# Altium PCB 海关全向控制器主控板电路V2.PcbDoc (part 3 of 3)
Units mil, origin at the board's own origin, x right, y up, seen from the top; angles counter-clockwise.
Board outline 7874.02 x 2362.2 mil, 2 copper layers (Top Layer, Bottom Layer), stack 42.17 mil thick; 192 components, 121 nets, 551 pads, 141 vias.
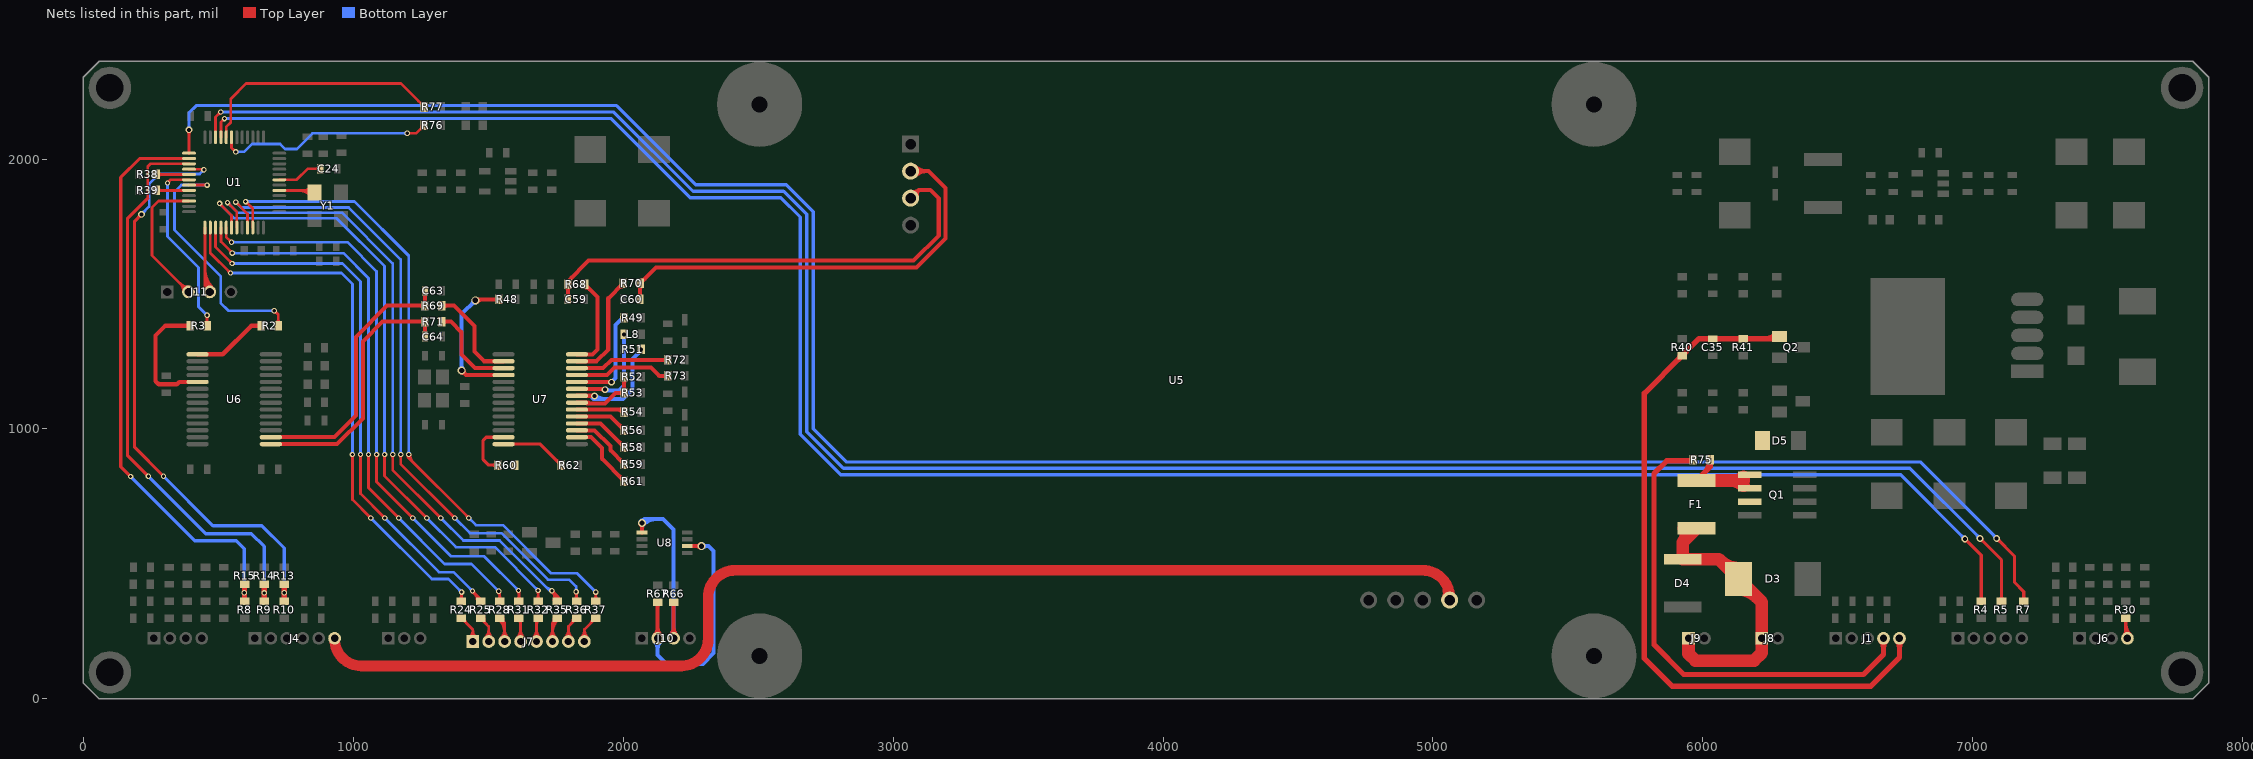
[diagram p3: the nets of this part, all layers, seen from the top]

## Via types
v1: diameter 20, hole 12, Top Layer to Bottom Layer, tented both sides, 71 vias
v2: diameter 25, hole 15, Top Layer to Bottom Layer, tented both sides, 34 vias
v3: diameter 50, hole 30, Top Layer to Bottom Layer, tented both sides, 18 vias
v4: diameter 30, hole 20, Top Layer to Bottom Layer, tented both sides, 10 vias
v5: diameter 70.87, hole 47.24, Top Layer to Bottom Layer, tented both sides, 5 vias
v6: diameter 60, hole 40, Top Layer to Bottom Layer, tented both sides, 3 vias

## Nets (pads, with @x,y where several pads share a name; then routed paths per layer and width w, separated by ;. In a path a pad name is that pad's centre, name@x,y a point inside that pad or via, vN(x,y) a via of type N, cw(c..) or ccw(c..) an arc to the next point about the centre after c; other vN are vias at no path point) (continued)
NetJ6_4: J6.4 R30.2 | length 200.1
  Top Layer w12: J6.4@7560.37,236.87 ccw(c7544.55,252.7) 7566.93,252.7 ; R30.2@7561.43,293.71 cw(c7548.15,280.43) 7566.93,280.43 cw(c7585.71,280.43) R30.2@7572.43,293.71 ; 7566.93,252.24 ccw(c7600.66,252.24) J6.4@7576.81,228.38 ; 7566.93,281.21 ccw(c7629.64,281.21) J6.4@7585.3,236.87 ; R30.2@7566.93,299.21 7566.93,230.31 J6.4@7572.83,224.41
NetJ7_1: J7.1 R24.1 | length 206.4
  Top Layer w10: R24.1@1400.57,299.21 1442.91,256.87 ; R24.1@1404.51,290.43 cw(c1404.51,278.74) R24.1@1412.78,287.01 ; R24.1@1413.29,299.21 ccw(c1443.99,299.21) 1422.28,277.5 ; J7.1@1429.89,225.91 ccw(c1399.6,256.87) 1442.91,256.87 ; J7.1@1442.91,212.6 1442.91,256.87 ; J7.1@1455.94,225.91 cw(c1486.23,256.87) 1442.91,256.87
NetJ7_2: J7.2 R25.1 | length 203.1
  Top Layer w10: R25.1@1471.73,299.21 1501.97,268.97 J7.2@1501.97,212.6 ; R25.1@1475.66,290.43 cw(c1475.66,278.74) R25.1@1483.93,287.01 ; R25.1@1484.44,299.21 ccw(c1515.14,299.21) 1493.43,277.5 ; J7.2@1488.8,225.77 ccw(c1457.01,257.56) 1501.97,257.56 ccw(c1546.93,257.56) J7.2@1515.14,225.77
NetJ7_3: J7.3 R28.1 | length 305.2
  Top Layer w10: R28.1@1540.61,293 cw(c1491.32,243.72) 1561.02,243.72 ; R28.1@1542.88,299.21 1561.02,281.07 ; R28.1@1547.68,300.08 cw(c1515.46,267.86) 1561.02,267.86 ; J7.3@1547.86,225.77 ccw(c1516.07,257.56) 1561.02,257.56 ccw(c1605.98,257.56) J7.3@1574.19,225.77 ; R28.1@1555.08,287.01 ccw(c1546.82,278.74) 1546.82,290.43 cw(c1546.76,276.17) 1561.02,276.17 ; R28.1@1555.5,297.9 ccw(c1574.9,294.95) 1561.02,281.07 ; J7.3@1561.02,212.6 1561.02,281.07
NetJ7_4: J7.4 R31.1 | length 193
  Top Layer w10: J7.4@1606.91,225.77 ccw(c1575.12,257.56) 1620.08,257.56 ccw(c1665.04,257.56) J7.4@1633.25,225.77 ; R31.1@1611.76,293 cw(c1591.67,272.92) 1620.08,272.92 ; R31.1@1614.03,299.21 1620.08,293.16 J7.4@1620.08,212.6 ; 1620.08,283.12 cw(c1634.06,283.12) R31.1@1624.18,293
NetJ7_5: J7.5 R32.1 | length 193
  Top Layer w10: J7.5@1665.97,225.77 ccw(c1634.18,257.56) 1679.13,257.56 ccw(c1724.09,257.56) J7.5@1692.3,225.77 ; R32.1@1675.04,293 cw(c1665.15,283.11) 1679.13,283.11 ; J7.5@1679.13,212.6 1679.13,293.16 R32.1@1685.18,299.21 ; 1679.13,272.92 cw(c1707.54,272.92) R32.1@1687.45,293
NetJ7_6: J7.6 R35.1 | length 305.2
  Top Layer w10: J7.6@1725.02,225.77 ccw(c1693.23,257.56) 1738.19,257.56 ccw(c1783.15,257.56) J7.6@1751.36,225.77 ; J7.6@1738.19,212.6 1738.19,281.07 ; 1738.19,243.72 cw(c1807.89,243.72) R35.1@1758.6,293 ; 1738.19,267.86 cw(c1783.75,267.86) R35.1@1751.53,300.08 ; 1738.19,276.17 cw(c1752.45,276.17) 1752.42,290.43 ccw(c1752.4,278.74) R35.1@1744.13,287.01 ; R35.1@1743.72,297.89 cw(c1724.31,294.95) 1738.19,281.07 ; R35.1@1756.33,299.21 1738.19,281.07
NetJ7_7: J7.7 R36.1 | length 203.1
  Top Layer w10: J7.7@1784.08,225.77 ccw(c1752.29,257.56) 1797.24,257.56 ccw(c1842.2,257.56) J7.7@1810.41,225.77 ; J7.7@1797.24,212.6 1797.24,268.97 R36.1@1827.49,299.21 ; 1805.78,277.5 ccw(c1784.07,299.21) R36.1@1814.77,299.21 ; R36.1@1815.28,287.01 cw(c1823.55,278.74) R36.1@1823.55,290.43
NetJ7_8: J7.8 R37.1 | length 206.4
  Top Layer w10: J7.8@1843.28,225.91 ccw(c1812.98,256.87) 1856.3,256.87 ; J7.8@1856.3,212.6 1856.3,256.87 ; J7.8@1869.32,225.91 cw(c1899.62,256.87) 1856.3,256.87 ; 1876.93,277.5 ccw(c1855.22,299.21) R37.1@1885.92,299.21 ; R37.1@1886.43,287.01 cw(c1894.7,278.74) R37.1@1894.7,290.43 ; R37.1@1898.64,299.21 1856.3,256.87
NetL8_1: L8.1 U7.23 | length 412.6
  Top Layer w15: U7.23@1828.74,1148.62 1930.12,1148.62 v2(1933.07,1145.67) ; 1913.87,1148.62 cw(c1913.87,1126.47) v2@1929.54,1142.13
  Bottom Layer w15: v2(1933.07,1145.67) 1937.01,1141.73 1984.25,1141.73 2003.94,1161.42 v2(2003.94,1350.39) ; v2@1936.61,1149.2 ccw(c1954.65,1167.25) 1954.65,1141.73
NetR2_2: R2.2 U6.1 | length 301.8
  Top Layer w16: U6.1@423.23,1276.57 516.73,1276.57 622.05,1381.89 R2.2@659.45,1381.89 ; R2.2@655.36,1377.8 ccw(c645.5,1367.94) 645.5,1381.89 ccw(c645.5,1395.84) R2.2@655.36,1385.98
NetR3_2: R3.2 U6.5 | length 497.9
  Top Layer w16: R3.2@391.58,1377.8 ccw(c381.72,1367.94) 381.72,1381.89 ccw(c381.72,1395.84) R3.2@391.58,1385.98 ; R3.2@395.67,1381.89 303.15,1381.89 267.72,1346.46 267.72,1177.17 279.53,1165.35 346.46,1165.35 355.32,1174.21 U6.5@423.23,1174.21
NetR48_1: R48.1 U7.4 | length 665.6
  Top Layer w15: v4@1401.57,1209.04 cw(c1401.57,1190.93) 1414.38,1203.73 cw(c1427.18,1216.54) v4@1409.07,1216.54 ; v4(1401.57,1216.54) 1418.31,1199.8 U7.4@1557.09,1199.8 ; v4(1452.76,1476.38) 1456.69,1480.32 R48.1@1539.37,1480.32 ; v4@1458.06,1471.07 cw(c1480.37,1448.77) 1480.37,1480.32 ; R48.1@1534.93,1475.87 ccw(c1524.21,1465.16) 1524.21,1480.32 ccw(c1524.21,1495.48) R48.1@1534.93,1484.76
  Bottom Layer w15: v4@1396.27,1221.84 ccw(c1383.47,1234.64) 1401.57,1234.64 ccw(c1419.68,1234.64) v4@1406.88,1221.84 ; v4(1401.57,1216.54) 1401.57,1425.2 v4(1452.76,1476.38) ; v4@1445.26,1476.38 cw(c1427.15,1476.38) 1439.95,1463.57 cw(c1452.76,1450.77) v4@1452.76,1468.88
NetR49_2: R49.2 U7.24 | length 398.6
  Top Layer w15: U7.24@1828.74,1174.21 1955.7,1174.21 v2(1956.69,1173.23) ; 1942.24,1174.21 cw(c1942.24,1158.77) v2@1953.15,1169.69
  Bottom Layer w15: v2(1956.69,1173.23) 1972.44,1188.98 1972.44,1385.83 v2(2000,1413.39)
NetR51_2: R51.2 U7.22 | length 468.3
  Top Layer w15: U7.22@1828.74,1123.03 1892.71,1123.03 v2(1893.7,1122.05) ; 1879.24,1123.03 cw(c1879.24,1107.59) v2@1890.16,1118.51
  Bottom Layer w15: v2@1886.63,1114.97 ccw(c1898.06,1126.41) 1898.06,1110.24 ; v2(1893.7,1122.05) 1905.51,1110.24 2000,1110.24 2035.43,1145.67 2035.43,1259.84 v2@2066.93,1291.34 ; v2@1897.23,1125.58 ccw(c1934.28,1162.62) 1934.28,1110.24 ; 2055.61,1280.02 ccw(c2040.35,1295.28) v2@2061.93,1295.28
  other v2: 2066.93,1295.28
NetR52_2: R52.2 R53.2 U7.21 | length 353.1
  Top Layer w15: U7.21@1828.74,1097.44 1871.06,1097.44 1874.02,1094.49 ; U7.21@1862.33,1097.09 cw(c1866.13,1086.6) 1874.02,1094.49 ; R53.2@1999.5,1129.42 ccw(c1988.78,1118.7) 1988.78,1133.86 ccw(c1988.78,1149.02) R53.2@1999.5,1138.3 ; R53.2@1999.5,1142.24 ccw(c1988.78,1152.96) 2003.94,1152.96 ccw(c2019.1,1152.96) R53.2@2008.38,1142.24 ; R52.2@1999.5,1184.54 cw(c1988.78,1173.82) 2003.94,1173.82 cw(c2019.1,1173.82) R52.2@2008.38,1184.54 ; R52.2@2003.94,1192.91 R53.2@2003.94,1133.86 1972.44,1133.86 1933.07,1094.49 1874.02,1094.49 ; U7.21@1862.47,1097.71 ccw(c1870.24,1105.47) 1870.24,1094.49 cw(c1870.24,1105.47) U7.21@1862.47,1097.71
NetR54_2: R54.2 U7.20 | length 204
  Top Layer w15: U7.20@1828.74,1071.85 1995.08,1071.85 R54.2@2003.94,1062.99 ; 1976.9,1071.85 cw(c1976.9,1039.89) R54.2@1999.5,1062.49
NetR56_2: R56.2 U7.19 | length 215.4
  Top Layer w15: U7.19@1828.74,1046.26 1953.74,1046.26 R56.2@2003.94,996.06 ; 1986.5,1013.5 ccw(c2003.94,1030.94) R56.2@2003.94,1006.28
NetR58_2: R58.2 U7.18 | length 230.9
  Top Layer w15: U7.18@1828.74,1020.67 1916.34,1020.67 R58.2@2003.94,933.07 ; 1986.5,950.51 ccw(c2003.94,967.95) R58.2@2003.94,943.29
NetR59_2: R59.2 U7.17 | length 255.6
  Top Layer w15: U7.17@1828.74,995.08 1894.68,995.08 1952.76,937.01 1952.76,921.26 R59.2@2003.94,870.08 ; 1986.5,887.52 ccw(c2003.94,904.96) R59.2@2003.94,880.3
NetR60_1: R60.1 U7.13 | length 243.7
  Top Layer w12: R60.1@1529.93,860.64 ccw(c1516.65,847.36) 1516.65,866.14 ccw(c1516.65,884.92) R60.1@1529.93,871.64 ; R60.1@1535.43,866.14 1501.97,866.14 1481.3,886.81 1481.3,957.68 1493.11,969.49 U7.13@1557.09,969.49
NetR61_2: R61.2 U7.16 | length 284.9
  Top Layer w15: U7.16@1828.74,969.49 1880.91,969.49 1921.26,929.13 1921.26,889.76 R61.2@2003.94,807.09 ; 1986.5,824.53 ccw(c2003.94,841.97) R61.2@2003.94,817.3
NetR62_1: R62.1 U7.14 | length 268
  Top Layer w12: U7.14@1557.09,943.9 1692.91,943.9 R62.1@1770.67,866.14 ; 1750.67,886.14 ccw(c1770.67,906.14) R62.1@1770.67,877.86
NetR68_2: R68.2 U7.28 | length 363.6
  Top Layer w15: U7.28@1828.74,1276.57 1886.81,1276.57 1905.51,1295.28 1905.51,1488.19 R68.2@1858.27,1535.43 ; R68.2@1858.27,1525.22 cw(c1858.27,1500.55) 1875.71,1517.99
NetR69_1: R69.1 U7.2 | length 390.7
  Top Layer w15: R69.1@1330.71,1456.69 1374.02,1456.69 1448.82,1381.89 1448.82,1287.4 1485.24,1250.98 U7.2@1557.09,1250.98 ; R69.1@1333.18,1452.25 cw(c1343.9,1441.53) 1343.9,1456.69 cw(c1343.9,1471.85) R69.1@1333.18,1461.13
NetR70_2: R70.2 U7.27 | length 420.8
  Top Layer w15: U7.27@1828.74,1250.98 1900.59,1250.98 1944.88,1295.28 1944.88,1484.25 R70.2@2000,1539.37 ; 1982.56,1521.93 cw(c2000,1504.49) R70.2@2000,1529.15
NetR71_1: R71.1 U7.3 | length 370
  Top Layer w15: R71.1@1330.71,1397.64 1362.2,1397.64 1401.57,1358.27 1401.57,1275.59 1451.77,1225.39 U7.3@1557.09,1225.39 ; R71.1@1333.18,1393.2 cw(c1343.9,1382.48) 1343.9,1397.64 cw(c1343.9,1412.8) R71.1@1333.18,1402.08
NetR72_2: R72.2 U7.26 | length 373.1
  Top Layer w15: U7.26@1828.74,1225.39 1926.18,1225.39 1956.69,1255.91 R72.2@2165.35,1255.91 ; R72.2@2160.91,1251.47 ccw(c2150.19,1240.75) 2150.19,1255.91 ccw(c2150.19,1271.07) R72.2@2160.91,1260.35
NetR73_2: R73.2 U7.25 | length 382.2
  Top Layer w15: U7.25@1828.74,1199.8 1939.96,1199.8 1967.19,1227.03 2103.68,1227.03 2133.86,1196.85 R73.2@2163.39,1196.85 ; R73.2@2160.91,1192.41 ccw(c2150.19,1181.69) 2150.19,1196.85 ccw(c2150.19,1212.01) R73.2@2160.91,1201.29
NRST: C24.1 U1.7 | length 194.5
  Top Layer w10: U1.7@726.38,1923.23 790.35,1923.23 831.69,1964.57 C24.1@877.95,1964.57 ; C24.1@873.14,1959.75 ccw(c861.51,1948.12) 861.51,1964.57 ccw(c861.51,1981.01) C24.1@873.14,1969.38
POWLEDB1: R25.2 U1.39 | length 2283.7
  Top Layer w10: U1.39@490.16,1746.06 490.16,1674.21 v1(551.18,1613.19) ; v1@546.18,1613.19 ccw(c534.11,1613.19) 542.65,1621.72 ccw(c551.18,1630.26) v1@551.18,1618.19 ; v1@1023.32,901.98 cw(c1014.78,893.44) 1026.86,893.44 cw(c1038.93,893.44) v1@1030.39,901.98 ; v1(1026.86,905.51) 1026.86,760.26 v1(1116.84,670.28) ; v1@1111.84,670.28 ccw(c1099.77,670.28) 1108.31,678.81 ccw(c1116.84,687.35) v1@1116.84,675.28 ; v1@1119.94,673.37 v1@1120.08,673.23 ; v1@1440.64,394.78 cw(c1436.63,379.84) 1450.02,387.57 ; v1@1441.93,394.61 cw(c1441.93,382.54) 1450.46,391.07 cw(c1459,399.61) v1@1446.93,399.61 ; v1(1441.93,399.61) 1471.73,369.81 R25.2@1471.73,362.2 ; v1@1444.64,396.89 cw(c1409.95,362.2) R25.2@1459.01,362.2 ; 1461.71,379.82 cw(c1444.09,362.2) R25.2@1469.01,362.2
  Bottom Layer w10: v1(551.18,1613.19) 959.65,1613.19 1026.86,1545.98 v1(1026.86,905.51) ; v1@554.72,1609.65 cw(c563.25,1601.12) 563.25,1613.19 cw(c563.25,1625.26) v1@554.72,1616.72 ; v1@1023.32,909.05 ccw(c1014.78,917.58) 1026.86,917.58 ccw(c1038.93,917.58) v1@1030.39,909.05 ; v1@1116.84,665.28 cw(c1116.84,653.2) 1125.38,661.74 cw(c1133.92,670.28) v1@1121.84,670.28 ; v1(1116.84,670.28) 1317.77,469.35 1372.19,469.35 v1(1441.93,399.61) ; v1@1436.93,399.61 ccw(c1424.86,399.61) 1433.39,408.14 ccw(c1441.93,416.68) v1@1441.93,404.61
POWLEDB2: R31.2 U1.41 | length 2334.3
  Top Layer w10: U1.41@529.53,1746.06 529.53,1711.61 v1(549.21,1691.93) ; v1@544.21,1691.93 ccw(c532.14,1691.93) 540.68,1700.46 ccw(c549.21,1709) v1@549.21,1696.93 ; v1@1082.94,901.98 cw(c1074.4,893.44) 1086.47,893.44 cw(c1098.54,893.44) v1@1090.01,901.98 ; v1(1086.47,905.51) 1086.47,804.41 v1(1220.61,670.28) ; v1@1215.61,670.28 ccw(c1203.54,670.28) 1212.08,678.81 ccw(c1220.61,687.35) v1@1220.61,675.28 ; R31.2@1607.82,368.41 ccw(c1592.83,383.4) 1614.03,383.4 ccw(c1635.23,383.4) R31.2@1620.24,368.41 ; v1@1608.67,398.04 cw(c1595.73,385.1) 1614.03,385.1 ; R31.2@1614.03,362.2 v1@1614.03,399.75
  Bottom Layer w10: v1(549.21,1691.93) 978.35,1691.93 1086.47,1583.8 v1(1086.47,905.51) ; v1@552.75,1688.39 cw(c561.28,1679.86) 561.28,1691.93 cw(c561.28,1704) v1@552.75,1695.46 ; v1@1082.94,909.05 ccw(c1074.4,917.58) 1086.47,917.58 ccw(c1098.54,917.58) v1@1090.01,909.05 ; v1@1220.61,665.28 cw(c1220.61,653.2) 1229.15,661.74 cw(c1237.68,670.28) v1@1225.61,670.28 ; v1(1220.61,670.28) 1362.34,528.54 1485.24,528.54 v1(1612.2,401.57) ; v1@1607.2,401.57 ccw(c1595.13,401.57) 1603.67,410.11 ccw(c1612.2,418.65) v1@1612.2,406.57
POWLEDB3: R35.2 U1.43 | length 2690.6
  Top Layer w10: v1@534.45,1833.58 cw(c534.45,1821.51) 542.98,1830.05 cw(c551.52,1838.58) v1@539.45,1838.58 ; v1(534.45,1838.58) 568.9,1804.13 U1.43@568.9,1746.06 ; v1@1142.56,901.98 cw(c1134.02,893.44) 1146.09,893.44 cw(c1158.16,893.44) v1@1149.63,901.98 ; v1(1146.09,905.51) 1146.09,848.57 v1(1324.38,670.28) ; v1@1319.38,670.28 ccw(c1307.31,670.28) 1315.85,678.81 ccw(c1324.38,687.35) v1@1324.38,675.28 ; v1@1734.93,395.76 cw(c1731.8,384.1) 1742.26,390.14 cw(c1752.71,396.17) v1@1741.05,399.3 ; v1@1736.22,395.59 cw(c1736.22,383.52) 1744.76,392.06 cw(c1753.29,400.59) v1@1741.22,400.59 ; R35.2@1744.14,365.18 ccw(c1712.28,376.65) v1(1736.22,400.59) 1756.33,380.48 ; 1747.36,389.45 cw(c1728.66,370.75) R35.2@1753.55,361.79 ; R35.2@1750.85,369.06 ccw(c1741.71,380.48) 1756.33,380.48 ; R35.2@1756.33,362.2 1756.33,380.48 ; 1758.51,378.31 cw(c1745.05,364.85) R35.2@1762.95,358.4 ; R35.2@1761.82,369.06 cw(c1770.96,380.48) 1756.33,380.48
  Bottom Layer w10: v1@534.45,1833.58 cw(c534.45,1821.51) 542.98,1830.05 cw(c551.52,1838.58) v1@539.45,1838.58 ; v1(534.45,1838.58) 571.85,1801.18 957.68,1801.18 1146.09,1612.77 v1(1146.09,905.51) ; v1@1142.56,909.05 ccw(c1134.02,917.58) 1146.09,917.58 ccw(c1158.16,917.58) v1@1149.63,909.05 ; v1@1324.38,665.28 cw(c1324.38,653.2) 1332.92,661.74 cw(c1341.45,670.28) v1@1329.38,670.28 ; v1(1324.38,670.28) 1408.04,586.61 1542.32,586.61 1728.35,400.59 v1(1736.22,400.59) ; 1714.24,414.69 ccw(c1736.22,436.67) v1@1736.22,405.59
POWLEDB4: R37.2 U1.46 | length 2709.7
  Top Layer w10: v1@601.38,1837.52 cw(c601.38,1825.45) 609.91,1833.98 cw(c618.45,1842.52) v1@606.38,1842.52 ; v1(601.38,1842.52) 627.95,1815.95 U1.46@627.95,1746.06 ; v1@1200.71,905.51 ccw(c1219.53,905.51) 1206.22,892.2 ; v1@1202.17,901.98 cw(c1193.64,893.44) 1205.71,893.44 cw(c1217.78,893.44) v1@1209.24,901.98 ; v1(1205.71,905.51) 1205.71,892.72 v1(1428.15,670.28) ; v1@1210.71,905.51 ccw(c1253.67,905.51) 1223.29,875.13 ; v1@1423.15,670.28 ccw(c1411.08,670.28) 1419.61,678.81 ccw(c1428.15,687.35) v1@1428.15,675.28 ; R37.2@1892.43,368.41 ccw(c1877.44,383.4) 1898.64,383.4 ccw(c1919.83,383.4) R37.2@1904.85,368.41 ; v1@1895.09,392.13 cw(c1886.51,383.56) 1898.64,383.56 ; R37.2@1898.64,362.2 v1(1898.62,395.67) ; 1898.64,383.64 cw(c1910.66,383.64) v1@1902.16,392.13
  Bottom Layer w10: v1(601.38,1842.52) 1004.92,1842.52 1205.71,1641.73 v1(1205.71,905.51) ; v1@604.91,1838.98 cw(c613.45,1830.45) 613.45,1842.52 cw(c613.45,1854.59) v1@604.91,1846.06 ; v1@1202.17,909.05 ccw(c1193.64,917.58) 1205.71,917.58 ccw(c1217.78,917.58) v1@1209.24,909.05 ; v1@1428.15,665.28 cw(c1428.15,653.2) 1436.68,661.74 cw(c1445.22,670.28) v1@1433.15,670.28 ; v1(1428.15,670.28) 1454.72,643.7 1554.13,643.7 1732.28,465.55 1828.74,465.55 v1(1898.62,395.67) ; v1@1893.62,395.67 ccw(c1881.55,395.67) 1890.09,404.2 ccw(c1898.62,412.74) v1@1898.62,400.67
POWLEDR1: R24.2 U1.38 | length 2226.4
  Top Layer w10: U1.38@470.47,1746.06 470.47,1652.56 v1(545.28,1577.76) ; v1@540.28,1577.76 ccw(c528.2,1577.76) 536.74,1586.29 ccw(c545.28,1594.83) v1@545.28,1582.76 ; v1@993.51,901.98 cw(c984.98,893.44) 997.05,893.44 cw(c1009.12,893.44) v1@1000.58,901.98 ; v1(997.05,905.51) 997.05,738.19 v1(1064.96,670.28) ; v1@1059.96,670.28 ccw(c1047.89,670.28) 1056.43,678.81 ccw(c1064.96,687.35) v1@1064.96,675.28 ; R24.2@1394.37,368.41 ccw(c1379.38,383.4) 1400.57,383.4 ccw(c1421.77,383.4) R24.2@1406.78,368.41 ; v1@1399.61,396.65 1400.57,395.69 R24.2@1400.57,362.2 ; 1400.57,381.18 cw(c1416.06,381.18) v1@1405.11,392.13
  Bottom Layer w10: v1(545.28,1577.76) 956.69,1577.76 997.05,1537.4 v1(997.05,905.51) ; v1@548.81,1574.22 cw(c557.35,1565.68) 557.35,1577.76 cw(c557.35,1589.83) v1@548.81,1581.29 ; v1@993.51,909.05 ccw(c984.98,917.58) 997.05,917.58 ccw(c1009.12,917.58) v1@1000.58,909.05 ; v1@1064.96,665.28 cw(c1064.96,653.2) 1073.5,661.74 cw(c1082.03,670.28) v1@1069.96,670.28 ; v1(1064.96,670.28) 1291.34,443.9 1353.35,443.9 v1(1401.57,395.67) ; v1@1396.57,395.67 ccw(c1384.5,395.67) 1393.04,404.2 ccw(c1401.57,412.74) v1@1401.57,400.67
POWLEDR2: R28.2 U1.40 | length 2290.7
  Top Layer w10: U1.40@509.84,1746.06 509.84,1693.9 v1(552.17,1651.57) ; v1@547.17,1651.57 ccw(c535.09,1651.57) 543.63,1660.11 ccw(c552.17,1668.65) v1@552.17,1656.57 ; v1@1053.13,901.98 cw(c1044.59,893.44) 1056.66,893.44 cw(c1068.74,893.44) v1@1060.2,901.98 ; v1(1056.66,905.51) 1056.66,782.34 v1(1168.73,670.28) ; v1@1163.73,670.28 ccw(c1151.66,670.28) 1160.19,678.81 ccw(c1168.73,687.35) v1@1168.73,675.28 ; v1@1535.83,395.09 cw(c1518.83,378.08) 1542.88,378.08 ; R28.2@1536.67,368.41 ccw(c1521.68,383.4) 1542.88,383.4 ccw(c1564.07,383.4) R28.2@1549.09,368.41 ; R28.2@1542.88,362.2 v1@1542.88,395.11
  Bottom Layer w10: v1(552.17,1651.57) 963.58,1651.57 1056.66,1558.49 v1(1056.66,905.51) ; v1@555.7,1648.04 cw(c564.24,1639.5) 564.24,1651.57 cw(c564.24,1663.65) v1@555.7,1655.11 ; v1@1053.13,909.05 ccw(c1044.59,917.58) 1056.66,917.58 ccw(c1068.74,917.58) v1@1060.2,909.05 ; v1@1168.73,665.28 cw(c1168.73,653.2) 1177.26,661.74 cw(c1185.8,670.28) v1@1173.73,670.28 ; v1(1168.73,670.28) 1339,500 1437.99,500 v1(1539.37,398.62) ; v1@1534.37,398.62 ccw(c1522.3,398.62) 1530.83,407.16 ccw(c1539.37,415.69) v1@1539.37,403.62
POWLEDR3: R32.2 U1.42 | length 2561.4
  Top Layer w10: v1@504.92,1830.63 cw(c504.92,1818.56) 513.46,1827.09 cw(c521.99,1835.63) v1@509.92,1835.63 ; v1(504.92,1835.63) 549.21,1791.34 U1.42@549.21,1746.06 ; v1@1112.75,901.98 cw(c1104.21,893.44) 1116.28,893.44 cw(c1128.35,893.44) v1@1119.82,901.98 ; v1(1116.28,905.51) 1116.28,826.49 v1(1272.5,670.28) ; v1@1267.5,670.28 ccw(c1255.43,670.28) 1263.96,678.81 ccw(c1272.5,687.35) v1@1272.5,675.28 ; R32.2@1678.97,368.41 ccw(c1664.33,383.06) 1685.04,383.06 ; v1@1681.5,398.04 cw(c1672.97,389.5) 1685.04,389.5 cw(c1697.11,389.5) v1@1688.57,398.04 ; 1685.04,383.74 ccw(c1706.72,383.74) R32.2@1691.39,368.41 ; v1(1685.04,401.57) 1685.04,362.35 R32.2@1685.18,362.2
  Bottom Layer w10: v1@504.92,1830.63 cw(c504.92,1818.56) 513.46,1827.09 cw(c521.99,1835.63) v1@509.92,1835.63 ; v1(504.92,1835.63) 560.04,1780.51 938.98,1780.51 1116.28,1603.21 v1(1116.28,905.51) ; v1@1112.75,909.05 ccw(c1104.21,917.58) 1116.28,917.58 ccw(c1128.35,917.58) v1@1119.82,909.05 ; v1@1272.5,665.28 cw(c1272.5,653.2) 1281.03,661.74 cw(c1289.57,670.28) v1@1277.5,670.28 ; v1(1272.5,670.28) 1380.76,562.01 1524.61,562.01 v1(1685.04,401.57) ; v1@1680.04,401.57 ccw(c1667.97,401.57) 1676.5,410.11 ccw(c1685.04,418.65) v1@1685.04,406.57
POWLEDR4: R36.2 U1.45 | length 2662.6
  Top Layer w10: v1@564.96,1835.55 cw(c564.96,1823.48) 573.5,1832.02 cw(c582.03,1840.55) v1@569.96,1840.55 ; v1(564.96,1840.55) 608.27,1797.24 U1.45@608.27,1746.06 ; v1@1172.36,901.98 cw(c1163.83,893.44) 1175.9,893.44 cw(c1187.97,893.44) v1@1179.43,901.98 ; v1(1175.9,905.51) 1175.9,870.64 v1(1376.26,670.28) ; v1@1371.26,670.28 ccw(c1359.19,670.28) 1367.73,678.81 ccw(c1376.26,687.35) v1@1376.26,675.28 ; R36.2@1821.28,368.41 ccw(c1810.39,379.3) 1825.79,379.3 ; v1@1822.25,393.12 cw(c1813.72,384.58) 1825.79,384.58 cw(c1837.86,384.58) v1@1829.32,393.12 ; v1@1825.79,387.5 ccw(c1852.78,387.5) R36.2@1833.69,368.41 ; v1(1825.79,396.65) 1825.79,363.9 R36.2@1827.49,362.2 ; 1828.1,378.86 cw(c1847.58,384.07) v1@1830.12,394.15
  Bottom Layer w10: v1@564.96,1835.55 cw(c564.96,1823.48) 573.5,1832.02 cw(c582.03,1840.55) v1@569.96,1840.55 ; v1(564.96,1840.55) 584.65,1820.87 983.27,1820.87 1175.9,1628.23 v1(1175.9,905.51) ; v1@1172.36,909.05 ccw(c1163.83,917.58) 1175.9,917.58 ccw(c1187.97,917.58) v1@1179.43,909.05 ; v1@1376.26,665.28 cw(c1376.26,653.2) 1384.8,661.74 cw(c1393.34,670.28) v1@1381.26,670.28 ; v1(1376.26,670.28) 1432.37,614.17 1549.21,614.17 1721.46,441.93 1800.2,441.93 1825.79,416.34 v1(1825.79,396.65) ; v1@1822.25,400.19 ccw(c1813.72,408.72) 1825.79,408.72 ccw(c1837.86,408.72) v1@1829.32,400.19
POWSW+: J1.4 R75.1 | length 1836.8
  Top Layer w20: R75.1@5964.57,881.89 5866.14,881.89 5818.9,834.65 5818.9,200.79 5929.13,90.55 6594.49,90.55 6669.29,165.35 J1.4@6669.29,224.41 ; J1.4@6659.66,214.78 cw(c6636.41,191.52) 6669.29,191.52 cw(c6702.18,191.52) J1.4@6678.92,214.78
POWSW-: C35.2 J1.5 Q2.1 R40.2 R41.1 | length 2792.1
  Top Layer w20: R40.2@5910.06,1258.48 ccw(c5896.88,1271.65) R40.2@5915.51,1271.65 ; R40.2@5930.94,1271.65 cw(c5949.57,1271.65) R40.2@5936.4,1284.83 ; 6233.2,1334.65 ccw(c6233.2,1384.91) Q2.1@6268.74,1349.37 ; Q2.1@6283.46,1342.52 6275.59,1334.65 R41.1@6149.61,1334.65 C35.2@6036.42,1334.65 5986.22,1334.65 R40.2@5923.23,1271.65 5783.46,1131.89 5783.46,149.61 5885.83,47.24 6622.05,47.24 6728.35,153.54 J1.5@6728.35,224.41 ; J1.5@6718.71,214.78 cw(c6695.46,191.52) 6728.35,191.52 cw(c6761.23,191.52) J1.5@6737.98,214.78
SETDIG: R7.2 U1.25 | length 8396.3
  Top Layer w12: v2@387.14,2103.67 cw(c376.04,2092.58) 391.73,2092.58 cw(c407.42,2092.58) v2@396.33,2103.67 ; U1.25@391.73,2021.65 v2@391.73,2109.25 ; v2@7088.58,587.99 cw(c7088.58,572.3) 7099.68,583.39 cw(c7110.78,594.49) v2@7095.08,594.49 ; v2(7088.58,594.49) 7154.53,528.54 7154.53,432.09 7188.98,397.64 R7.2@7188.98,362.2 ; R7.2@7183.48,367.71 ccw(c7170.2,380.99) 7188.98,380.99 ccw(c7207.76,380.99) R7.2@7194.48,367.71
  Bottom Layer w12: v2@387.14,2112.86 ccw(c376.04,2123.96) 391.73,2123.96 ccw(c407.42,2123.96) v2@396.33,2112.86 ; v2(391.73,2108.27) 391.73,2171.26 418.46,2197.98 1975.69,2197.98 2268.77,1904.91 2604.43,1904.91 2704.12,1805.22 2704.12,1000.1 2826.11,878.1 6804.97,878.1 v2(7088.58,594.49) ; v2@7082.08,594.49 ccw(c7066.39,594.49) 7077.49,605.58 ccw(c7088.58,616.68) v2@7088.58,600.99
SLAVE1_N: C60.1 R70.1 U5.2 | length 1735.1
  Top Layer w15: R70.1@2058.55,1530.99 cw(c2047.83,1520.27) 2062.99,1520.27 cw(c2078.15,1520.27) R70.1@2067.43,1530.99 ; C60.1@2062.99,1480.31 R70.1@2062.99,1539.37 2122.05,1598.43 3086.54,1598.43 3186.97,1698.86 3194.29,1706.18 3194.29,1892.25 3131.42,1955.12 U5.2@3064.96,1955.12 ; R70.1@2062.99,1549.59 ccw(c2062.99,1574.25) 2080.43,1556.81 ; U5.2@3081.93,1938.15 cw(c3122.89,1897.19) 3122.89,1955.12 cw(c3122.89,2013.05) U5.2@3081.93,1972.09
SLAVE1_P: C59.1 R68.1 U5.3 | length 1884.7
  Top Layer w15: R68.1@1790.84,1527.06 cw(c1780.12,1516.34) 1795.28,1516.34 cw(c1810.44,1516.34) R68.1@1799.72,1527.06 ; C59.1@1795.28,1480.32 R68.1@1795.28,1535.43 1795.28,1547.24 1871.46,1623.43 3076.18,1623.43 3169.29,1716.54 3169.29,1854.33 3137.8,1885.83 3095.67,1885.83 ; R68.1@1801.56,1539.37 cw(c1835.72,1539.37) 1811.56,1563.53 ; U5.3@3064.96,1855.12 3095.67,1885.83 ; U5.3@3070.3,1878.51 ccw(c3076.37,1905.13) 3095.67,1885.83 ; U5.3@3088.36,1860.45 cw(c3114.97,1866.52) 3095.67,1885.83
SLAVE2_N: C63.1 R69.2 U6.16 | length 1047.5
  Top Layer w15: U6.16@694.88,969.49 930.12,969.49 1010.43,1049.8 1010.43,1341.14 1125.98,1456.69 R69.2@1265.75,1456.69 C63.1@1265.75,1511.81 ; R69.2@1261.31,1452.25 ccw(c1250.59,1441.53) 1250.59,1456.69 ccw(c1250.59,1471.85) R69.2@1261.31,1461.13 ; R69.2@1261.31,1465.07 ccw(c1250.59,1475.79) 1265.75,1475.79 ccw(c1280.91,1475.79) R69.2@1270.19,1465.07 ; R69.2@1266.73,1455.71 R69.2@1267.72,1456.69
SLAVE2_P: C64.1 R71.2 U6.15 | length 1029.5
  Top Layer w15: U6.15@694.88,943.9 929.53,943.9 930.12,944.49 940.47,944.49 1035.43,1039.45 1035.43,1323.82 1109.25,1397.64 R71.2@1265.75,1397.64 C64.1@1265.75,1342.52 ; R71.2@1261.31,1389.26 cw(c1250.59,1378.54) 1265.75,1378.54 cw(c1280.91,1378.54) R71.2@1270.19,1389.26 ; R71.2@1261.31,1393.2 ccw(c1250.59,1382.48) 1250.59,1397.64 ccw(c1250.59,1412.8) R71.2@1261.31,1402.08 ; R71.2@1266.73,1396.65 R71.2@1267.72,1397.64
SPAREIO1: R38.2 U1.29 | length 154.4
  Top Layer w10: R38.2@270.67,1942.91 U1.29@391.73,1942.91 ; R38.2@276.88,1936.71 cw(c291.87,1921.72) 291.87,1942.91 cw(c291.86,1964.11) R38.2@276.88,1949.12
SPAREIO2: R39.2 U1.32 | length 154.4
  Top Layer w10: R39.2@270.67,1883.86 U1.32@391.73,1883.86 ; R39.2@276.88,1877.65 cw(c291.87,1862.66) 291.87,1883.86 cw(c291.87,1905.05) R39.2@276.88,1890.07
SWCLK: J11.3 U1.37 | length 456.4
  Top Layer w10: 450.79,1547.32 ccw(c507.95,1547.32) J11.3@467.53,1506.9 ; 450.79,1571.46 ccw(c532.09,1571.46) J11.3@474.6,1513.97 ; 450.79,1595.6 ccw(c556.23,1595.6) J11.3@481.67,1521.04 ; U1.37@450.79,1746.06 450.79,1525.59 ; J11.3@452.1,1516.69 ccw(c445.45,1520.26) 450.79,1525.59 ; J11.3@459.69,1524.28 cw(c456.12,1530.92) 450.79,1525.59 ; J11.3@468.5,1507.87 450.79,1525.59
SWDIO: J11.2 U1.34 | length 586.1
  Top Layer w10: J11.2@371.14,1507.87 ccw(c326.18,1507.87) 357.97,1539.66 ccw(c389.76,1571.45) J11.2@389.76,1526.5 ; J11.2@389.76,1507.87 254.92,1642.72 254.92,1820.87 278.54,1844.49 U1.34@391.73,1844.49
TESTLED1: R76.1 U1.19 | length 923.9
  Top Layer w10: U1.19@549.21,2080.71 549.21,2041.34 v1@563.98,2026.57 ; 554.74,2035.81 ccw(c564.96,2046.02) v1@564.96,2031.57 ; 557.12,2033.43 cw(c550.27,2026.57) v1@559.96,2026.57 ; v1(1199.8,2095.47) 1233.27,2095.47 R76.1@1263.78,2125.98 ; v1@1203.34,2091.94 cw(c1211.87,2083.4) 1211.87,2095.47 cw(c1211.87,2107.54) v1@1203.34,2099.01 ; 1242.07,2104.28 cw(c1263.78,2082.57) R76.1@1263.78,2113.27 ; R76.1@1251.58,2113.78 ccw(c1243.31,2122.05) R76.1@1255,2122.05
  Bottom Layer w10: v1(564.96,2026.57) 595.47,2026.57 625,2056.1 729.33,2056.1 748.03,2037.4 791.34,2037.4 849.41,2095.47 v1@1198.82,2095.47 ; v1@568.5,2023.04 cw(c577.03,2014.5) 577.03,2026.57 cw(c577.03,2038.65) v1@568.5,2030.11 ; v1@1196.27,2091.94 ccw(c1187.73,2083.4) 1187.73,2095.47 ccw(c1187.73,2107.54) v1@1196.27,2099.01
TESTLED2: R77.1 U1.20 | length 959
  Top Layer w10: U1.20@529.53,2080.71 529.53,2119.09 546.26,2135.83 546.26,2222.44 603.35,2279.53 1177.17,2279.53 R77.1@1263.78,2192.91 ; 1242.07,2214.62 ccw(c1263.78,2236.33) R77.1@1263.78,2205.63 ; R77.1@1251.58,2205.12 cw(c1243.31,2196.85) R77.1@1255,2196.85
TTL_RX1: R2.1 U1.31 | length 1062.4
  Top Layer w10: U1.31@391.73,1903.54 v1(458.66,1903.54) ; v1@455.13,1900.01 ccw(c446.59,1891.47) 446.59,1903.54 ccw(c446.59,1915.61) v1@455.13,1907.08 ; v1@707.68,1432.99 cw(c707.68,1420.92) 716.21,1429.46 cw(c724.75,1437.99) v1@712.68,1437.99 ; v1(707.68,1437.99) 722.44,1423.23 R2.1@722.44,1381.89 ; R2.1@716.23,1392.03 ccw(c701.25,1407.02) 722.44,1407.02 ccw(c743.64,1407.02) R2.1@728.65,1392.03
  Bottom Layer w10: v1@455.13,1900.01 ccw(c446.59,1891.47) 446.59,1903.54 ccw(c446.59,1915.61) v1@455.13,1907.08 ; v1(458.66,1903.54) 363.19,1903.54 337.6,1877.95 337.6,1737.2 508.86,1565.94 508.86,1467.52 538.39,1437.99 v1(707.68,1437.99) ; v1@704.14,1434.46 ccw(c695.61,1425.92) 695.61,1437.99 ccw(c695.61,1450.06) v1@704.14,1441.53
TTL_RX3: R5.2 U1.22 | length 8116.1
  Top Layer w10: U1.22@490.16,2080.71 490.16,2155.51 v1(508.86,2174.21) ; v1@503.86,2174.21 cw(c491.79,2174.21) 500.32,2165.68 cw(c508.86,2157.14) v1@508.86,2169.21
  Top Layer w12: v2@7026.57,587.99 cw(c7026.57,572.3) 7037.67,583.39 cw(c7048.77,594.49) v2@7033.07,594.49 ; v2(7026.57,594.49) 7106.3,514.76 R5.2@7106.3,362.2 ; R5.2@7100.8,367.71 ccw(c7087.52,380.99) 7106.3,380.99 ccw(c7125.08,380.99) R5.2@7111.8,367.71
  Bottom Layer w12: v1@508.86,2173.98 1965.75,2173.98 2258.83,1880.91 2594.49,1880.91 2680.12,1795.28 2680.12,990.16 2816.17,854.1 6766.96,854.1 v2(7026.57,594.49) ; v1@511.69,2177.04 ccw(c519.07,2184.42) 519.07,2173.98 ; v2@7020.07,594.49 ccw(c7004.38,594.49) 7015.48,605.58 ccw(c7026.57,616.68) v2@7026.57,600.99
TTL_TX1: R3.1 U1.30 | length 784
  Top Layer w10: v1(312.01,1911.42) 323.82,1923.23 U1.30@391.73,1923.23 ; v1@312.01,1916.42 ccw(c312.01,1928.49) 320.54,1919.95 ccw(c329.08,1911.42) v1@317.01,1911.42 ; R3.1@452.45,1392.03 ccw(c437.47,1407.02) 458.66,1407.02 ccw(c479.86,1407.02) R3.1@464.87,1392.03 ; v1@455.13,1417.72 cw(c446.59,1409.19) 458.66,1409.19 cw(c470.73,1409.19) v1@462.2,1417.72 ; R3.1@458.66,1381.89 v1(458.66,1421.26)
  Bottom Layer w10: v1@308.47,1907.88 cw(c299.94,1899.35) 312.01,1899.35 cw(c324.08,1899.35) v1@315.54,1907.88 ; v1(312.01,1911.42) 312.01,1713.58 427.17,1598.43 427.17,1452.76 v1(458.66,1421.26) ; v1@453.66,1421.26 ccw(c441.59,1421.26) 450.13,1429.8 ccw(c458.66,1438.33) v1@458.66,1426.26
TTL_TX3: R4.2 U1.21 | length 7992.6
  Top Layer w10: U1.21@509.84,2080.71 509.84,2136.81 v1(523.02,2149.98) ; v1@518.02,2149.98 cw(c505.94,2149.98) 514.48,2141.45 cw(c523.02,2132.91) v1@523.02,2144.98
  Top Layer w12: v2@6970.47,586.02 cw(c6970.47,567.95) 6983.25,580.73 ; v2@6970.96,593.01 7031.5,532.48 R4.2@7031.5,362.2 ; v2@6976.97,592.52 ccw(c6990.29,592.52) 6980.87,583.1 ; R4.2@7026,367.71 ccw(c7012.71,380.99) 7031.5,380.99 ccw(c7050.28,380.99) R4.2@7037,367.71
  Bottom Layer w12: v1(523.02,2149.98) 1955.81,2149.98 2248.89,1856.91 2584.55,1856.91 2656.12,1785.33 2656.12,980.22 2806.23,830.1 6732.89,830.1 v2(6970.47,592.52) ; v2@6963.97,592.52 ccw(c6948.28,592.52) 6959.38,603.62 ccw(c6970.47,614.71) v2@6970.47,599.02
USB_5V: R60.2
USB_N: J10.3 R66.1 U8.5 | length 999.2
  Top Layer w15: v4@2064.58,646.27 cw(c2051.3,632.99) 2070.08,632.99 ; U8.5@2070.08,617.13 v4@2070.08,651.57 ; 2070.08,633.94 cw(c2087.51,633.94) v4@2075.19,646.27 ; J10.3@2175.61,235.81 ccw(c2148.09,263.33) 2187.01,263.33 ccw(c2225.93,263.33) J10.3@2198.41,235.81 ; R66.1@2182.57,353.83 cw(c2171.85,343.11) 2187.01,343.11 cw(c2202.17,343.11) R66.1@2191.45,353.83 ; J10.3@2187.01,224.41 R66.1@2187.01,358.27
  Bottom Layer w15: v4@2064.58,656.88 cw(c2089.79,631.66) 2089.79,667.32 ; v4(2069.88,651.57) 2085.63,667.32 2147.64,667.32 2187.01,627.95 J10.3@2187.01,224.41 ; v4@2069.88,659.07 ccw(c2069.88,677.18) 2082.69,664.38 ccw(c2095.49,651.57) v4@2077.38,651.57 ; v4@2075.19,646.27 cw(c2126.01,595.45) 2126.01,667.32 ; J10.3@2175.61,235.81 ccw(c2148.09,263.33) 2187.01,263.33 ccw(c2225.93,263.33) J10.3@2198.41,235.81
USB_P: J10.2 R67.1 U8.2 | length 1118.1
  Top Layer w15: J10.2@2116.55,235.81 ccw(c2089.03,263.33) 2127.95,263.33 ccw(c2166.87,263.33) J10.2@2139.35,235.81 ; R67.1@2123.51,353.83 cw(c2112.79,343.11) 2127.95,343.11 cw(c2143.11,343.11) R67.1@2132.39,353.83 ; J10.2@2127.95,224.41 R67.1@2127.95,358.27 ; U8.2@2237.01,565.94 v4(2290.35,565.94) ; v4@2285.05,560.64 ccw(c2272.25,547.84) 2272.25,565.94 ccw(c2272.25,584.05) v4@2285.05,571.25
  Bottom Layer w15: J10.2@2116.55,213.01 cw(c2089.03,185.49) 2127.95,185.49 cw(c2166.87,185.49) J10.2@2139.35,213.01 ; J10.2@2127.95,224.41 2127.95,163.39 2161.42,129.92 2295.28,129.92 2334.65,169.29 2334.65,547.24 2315.94,565.94 v4(2290.35,565.94) ; v4@2295.66,560.64 cw(c2308.46,547.84) 2308.46,565.94 cw(c2308.46,584.05) v4@2295.66,571.25
VBAT+: D3.1 D4.1 F1.1 J8.1 J9.1 | length 1238.5
  Top Layer w47.24: F1.1@5929.13,631.89 cw(c5897.31,608.6) 5925.2,580.71 ; J9.1@5946.85,224.41 5946.85,167.32 5972.44,141.73 6188.98,141.73 6218.5,171.26 J8.1@6218.5,224.41 6218.5,358.27 D3.1@6131.89,444.88 6059.06,517.72 D4.1@5925.2,517.72 5925.2,580.71 ; F1.1@5976.38,631.89 5925.2,580.71 ; 6064.68,512.09 ccw(c6131.89,579.3) D3.1@6131.89,484.25 ; D3.1@6131.89,405.51 cw(c6131.89,310.46) 6199.1,377.67
VCC: D5.2 F1.2 Q1.1 Q1.2 Q1.3 R75.2 | length 406.5
  Top Layer w20: F1.2@5976.38,809.06 6027.56,860.24 R75.2@6027.56,881.89 ; 6005.8,838.47 ccw(c5962.38,881.89) R75.2@6023.78,881.89
  Top Layer w47.24: F1.2@5976.38,809.06 6151.38,809.06 ; 6102.29,809.06 cw(c6102.29,741.46) Q1.2@6150.08,789.26 ; 6117.5,809.06 ccw(c6117.5,855.14) Q1.1@6150.08,822.55
VEDIO: J4.6 U5.8 | length 4555.6
  Top Layer w39.37: J4.6@931.1,224.41 931.1,222.05 ccw(c1031.1,222.05) 1031.1,122.05 2214.96,122.05 ccw(c2214.96,222.05) 2314.96,222.05 2314.96,376.38 cw(c2414.96,376.38) 2414.96,476.38 4961.96,476.38 cw(c4961.96,376.38) 5061.96,376.38 U5.8@5061.96,366.12 ; U5.8@5051.73,372.02 ccw(c5019.19,390.81) 5055.49,400.54
VEDIO_CH1: R8.2 R15.2 U1.26 | length 2162.8
  Top Layer w10: 208.66,2001.97 U1.26@391.73,2001.97
  Top Layer w12: v1(175.2,823.82) 138.78,860.24 138.78,1932.09 208.66,2001.97
  Top Layer w20: R8.2@597.42,362.2 R15.2@597.42,425.2
  Bottom Layer w12: v1(175.2,823.82) 413.39,585.63 566.93,585.63 596.46,556.1 v1(596.46,393.7)
VEDIO_CH2: R9.2 R14.2 U1.27 | length 2140.5
  Top Layer w10: 239.17,1854.33 239.17,1973.43 248.03,1982.28 U1.27@391.73,1982.28
  Top Layer w12: 239.17,1854.33 163.39,1778.54 163.39,902.56 v1(241.14,824.8)
  Top Layer w20: R9.2@670.76,362.2 R14.2@670.76,425.2
  Bottom Layer w12: v1(241.14,824.8) 453.74,612.2 623.03,612.2 670.28,564.96 v1(670.28,392.72)
VEDIO_CH3: R10.2 R13.2 U1.28 | length 2302.3
  Top Layer w10: U1.28@391.73,1962.6 444.88,1962.6 v1(446.85,1960.63) ; 430.03,1962.6 cw(c430.03,1943.81) v1@443.31,1957.09
  Top Layer w12: v2@209.05,1795.28 cw(c193.36,1795.28) 204.46,1784.18 cw(c215.55,1773.08) v2@215.55,1788.78 ; v2(215.55,1795.28) 189.96,1769.68 189.96,932.09 v1(297.24,824.8)
  Top Layer w20: R10.2@744.09,362.2 R13.2@744.09,425.2
  Bottom Layer w10: v2(215.55,1795.28) 244.09,1823.82 244.09,1907.48 281.5,1944.88 431.1,1944.88 v1(446.85,1960.63) ; v2@215.55,1802.78 ccw(c215.55,1820.88) 228.35,1808.08 ccw(c241.16,1795.28) v2@223.05,1795.28 ; v1@441.85,1960.63 cw(c429.78,1960.63) 438.31,1952.09 cw(c446.85,1943.56) v1@446.85,1955.63
  Bottom Layer w12: v1(297.24,824.8) 480.31,641.73 661.42,641.73 744.09,559.06 v1(744.09,393.7)
XTAL: U1.5 Y1.3 | length 241.9
  Top Layer w10: U1.5@726.38,1883.86 848.42,1883.86 Y1.3@856.3,1875.98 ; 797.08,1883.86 cw(c797.08,1820.71) Y1.3@841.74,1865.36 ; 816.09,1883.86 ccw(c816.09,1920.13) Y1.3@841.74,1894.48 ; 821.23,1883.86 cw(c821.23,1844.85) Y1.3@848.81,1872.43
pads on no net: J10.4 R38.1 R39.1 U1.2 U1.3 U1.4 U1.6 U5. U5.6 U5.7 U5.9 U6.2 U6.3 U6.6 U6.8 U6.9 U6.10 U6.11 U6.12 U6.13 U6.14 U6.19 U6.24 U6.27 U6.28 U7.8 U7.9 U7.11 U7.12 Y1.1

## Keep-outs
Keep-Out Layer:
  the board outline again, w10

## Other copper
Top Layer:
  rectangle net VBAT+: 5901.57,496.06 6102.36,661.42
  rectangle net VBAT+: 6086.61,204.72 6240.16,633.86
  rectangle net GND: 6259.84,181.1 6437.01,629.92
  rectangle net GND: 6334.65,511.81 6775.59,629.92
  rectangle net GND: 6614.17,519.68 6775.59,850.39
  rectangle net GND: 6614.17,692.91 7417.32,850.39
  rectangle net +12V: 6468.5,917.32 7421.26,1047.24
  rectangle net +12V: 6444.88,657.48 6578.74,1047.24
  rectangle net +12V: 6330.71,657.48 6578.74,866.14
  rectangle net VCC: 6125.98,720.47 6216.54,992.13

## Silkscreen, mask and mechanical layers (free items; w line width, h text height)
Top Overlay:
  text "摇杆" at 7700.79,118.11 h80 r90
  text "数传" at 7314.96,102.36 h80 r90
  text "摇杆" at 562.99,98.43 h80 r90
  text "图传" at 1055.12,98.43 h80 r90
  text "按键" at 6862.2,98.43 h80 r90
  text "按键" at 1370.08,94.49 h80 r90
  text "充电" at 6409.45,94.49 h80 r90
  text "电池" at 6137.8,90.55 h80 r90
  text "指示灯" at 1984.25,82.68 h80 r90